# EAGLE board ESP8266BMESensor (EAGLE 8.6.3)
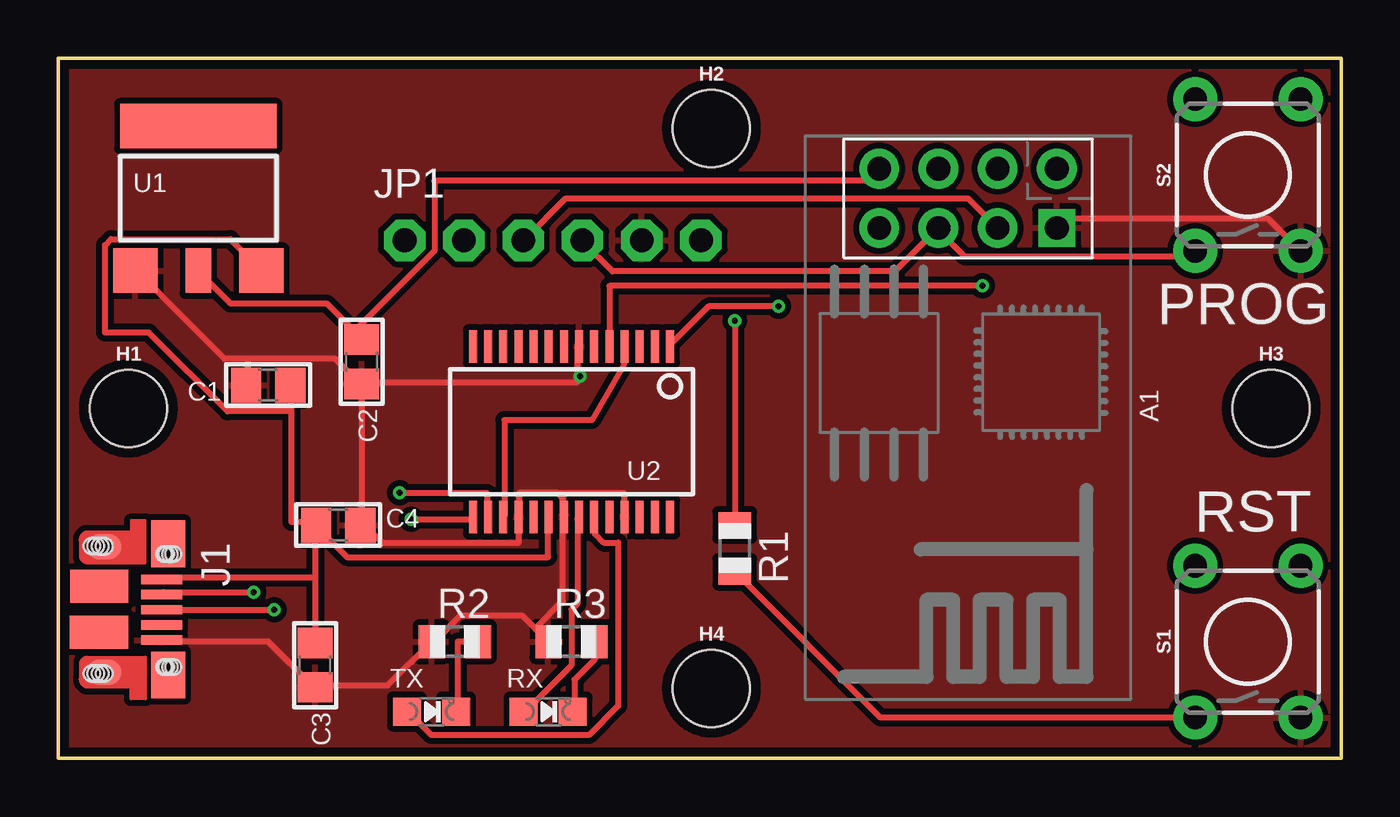
[diagram p0: board, top side]
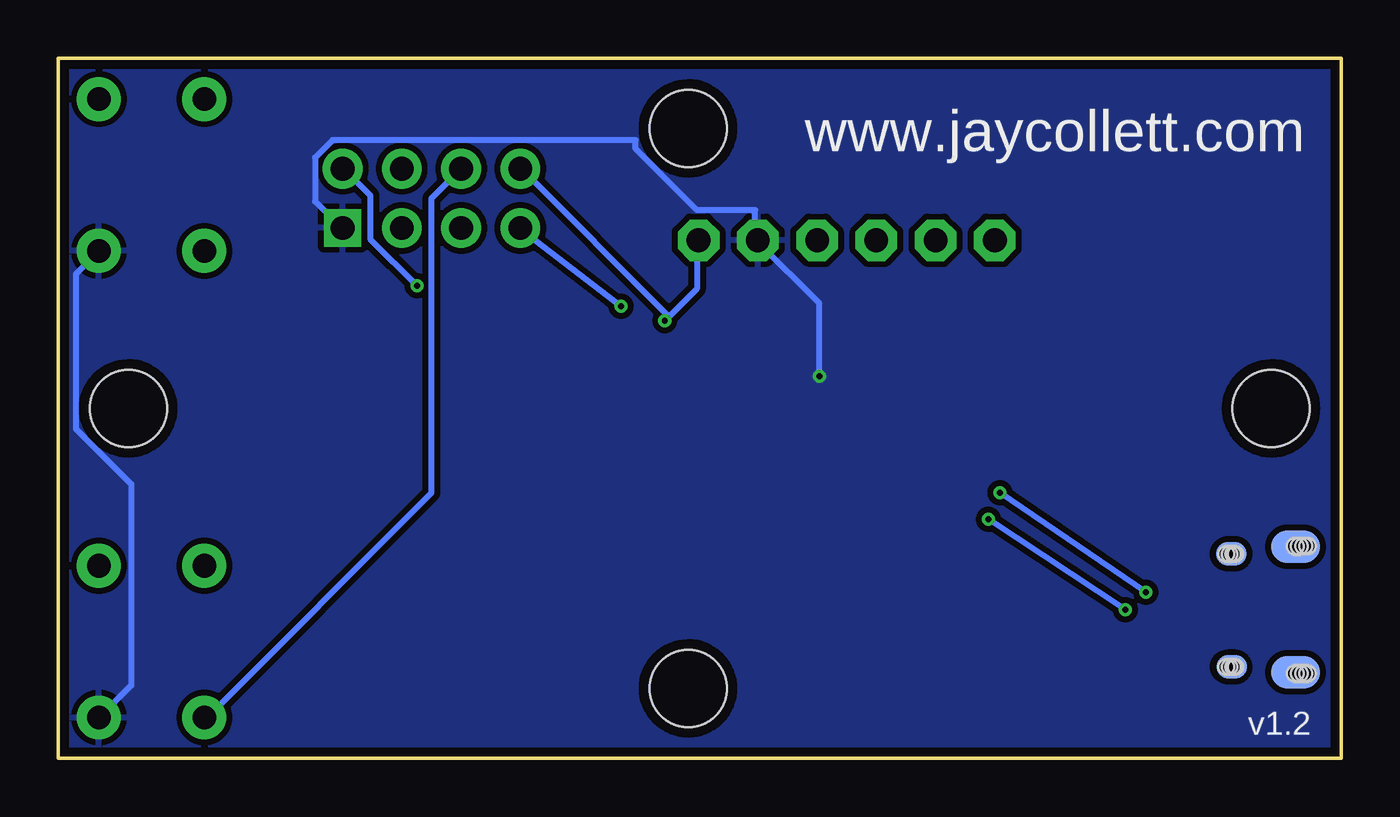
[diagram p1: board, bottom side, seen from below]

Size 55 x 30 mm. Coordinates in mm from the lower left corner, seen from the top.
Outline: 0,0 55,0 55,30 0,30 0,0
Copper layers (1*16): Top 0.035559375mm / dielectric 1.6mm / Bottom 0.035559375mm
Design rules "oshpark-2layer-auto-routing": minimum track width 10mil, minimum drill 10mil, track to track 10mil, track to pad 8mil, pad to pad 8mil, via to via 8mil, smd to smd 6mil, copper to edge 15mil, drill to drill 6mil, minimum pad ring 6mil, minimum via ring 6mil, stop-mask expansion 2.5mil, vias tented up to drill 0mil, thermal gap 10mil

## Footprints (pad centres in the part's own frame; a part is rotated, then mirrored left to right if it is on the bottom)
ESP8266_ESP-01_NO-SILKSCREEN = drill 1.016 pad 1.7: 3V3 -1.27,-3.81; EN/CH_PD -1.27,1.27; GPIO0 1.27,-1.27; GPIO2 1.27,1.27; RST -1.27,-1.27; RX 1.27,-3.81; TX -1.27,3.81 | drill 1.016 pad 1.6 square: GND 1.27,3.81
0805 = smd 1.3 x 1.5: 1 -0.95,0; 2 0.95,0
STAND-OFF = hole 3.302: 0,0
USB-MICROB-PTH = smd 0.4 x 1.75: D+ 0.031,1.331; D- -0.619,1.331; GND 1.331,1.331; ID 0.681,1.331; VBUS -1.269,1.331 | smd 1.4 x 2.1 bottom: P$1 2.701,-1.142; P$3 -2.659,-1.144 | smd 1 x 1.3: P$2 2.487,1.594; P$6 -2.368,1.604 | smd 1 x 1.3 bottom: P$4 -2.368,1.604; P$10 2.481,1.598 | smd 1.1 x 1.5: P$8 2.701,-1.142; P$12 -2.659,-1.144 | smd 2 x 1.46: SHEILD2 2.831,1.606; SHIELD -2.794,1.606 | smd 1.425 x 2.5: SHIELD3 -0.979,-1.349; SHIELD4 0.996,-1.352 | hole 0.7: -2.693,-1.134; -2.693,-1.3; -2.694,-1.499; -2.694,-1.664; 2.768,-1.134; 2.767,-1.303; 2.766,-1.496; 2.766,-1.664 | hole 0.66: -2.359,1.821; -2.349,1.691; -2.359,1.541; -2.354,1.432; 2.481,1.821; 2.491,1.691; 2.481,1.541; 2.486,1.432
1X06-CLEANBIG = drill 1.016 pad 1.778 octagon: 1 -6.35,0; 2 -3.81,0; 3 -1.27,0; 4 1.27,0; 5 3.81,0; 6 6.35,0
R0805 = smd 1.1 x 1.4: 1 -1,0; 2 1,0
CHIPLED_0805_NOOUTLINE = smd 1.2 x 1.2: A 0,-1.05; C 0,1.05
TACTILE_SWITCH_PTH_6.0MM = drill 1.016 pad 1.88: 1 -3.251,2.261; 2 3.251,2.261; 3 -3.251,-2.261; 4 3.251,-2.261
SOT223-W = smd 1.9 x 1.9: 1 -2.7,-3.1; 3 2.7,-3.1 | smd 1.1 x 1.9: 2 0,-3.1 | smd 6.7 x 1.9: 4 0,3.1
SSOP28DB = smd 0.348 x 1.397: 1 -4.225,-3.656; 2 -3.575,-3.656; 3 -2.925,-3.656; 4 -2.275,-3.656; 5 -1.625,-3.656; 6 -0.975,-3.656; 7 -0.325,-3.656; 8 0.325,-3.656; 9 0.975,-3.656; 10 1.625,-3.656; 11 2.275,-3.656; 12 2.925,-3.656; 13 3.575,-3.656; 14 4.225,-3.656; 15 4.225,3.656; 16 3.575,3.656; 17 2.925,3.656; 18 2.275,3.656; 19 1.625,3.656; 20 0.975,3.656; 21 0.325,3.656; 22 -0.325,3.656; 23 -0.975,3.656; 24 -1.625,3.656; 25 -2.275,3.656; 26 -2.925,3.656; 27 -3.575,3.656; 28 -4.225,3.656

## Placement (x,y rotation side)
A1  [ESP8266_ESP-01_NO-SILKSCREEN]  39,24 270 top
C1  1uF  [0805]  9,16 180 top
C2  1uF  [0805]  13,17 270 top
C3  0.1uF  [0805]  11,4 270 top
C4  10uF  [0805]  12,10 0 top
FRAME1  FRAME-LETTERNO_PACKAGE  [DUMMY]  35,1 0 top
H1  STAND-OFF  [STAND-OFF]  3,15 0 top
H2  STAND-OFF  [STAND-OFF]  28,27 0 top
H3  STAND-OFF  [STAND-OFF]  52,15 0 top
H4  STAND-OFF  [STAND-OFF]  28,3 0 top
J1  AMP FCI 10103594-0001LF  [USB-MICROB-PTH]  3.1,6.4 270 top
JP1  [1X06-CLEANBIG]  21.2,22.2 0 top
R1  10k  [R0805]  29,9 270 top
R2  330  [R0805]  17,5 0 top
R3  330  [R0805]  22,5 0 top
RX  [CHIPLED_0805_NOOUTLINE]  21,2 270 top
S1  MOMENTARY-SWITCH-SPST-PTH-6.0MM  [TACTILE_SWITCH_PTH_6.0MM]  51,5 90 top
S2  MOMENTARY-SWITCH-SPST-PTH-6.0MM  [TACTILE_SWITCH_PTH_6.0MM]  51,25 90 top
TX  [CHIPLED_0805_NOOUTLINE]  16,2 270 top
U1  [SOT223-W]  6,24 0 top
U2  [SSOP28DB]  22,14 180 top

## Library data of the parts
A1 = LuisLab-Boards
C1-C4 RX TX U1 U2 = microbuilder
FRAME1 = SparkFun-Aesthetics; DESIGNER: Nobody; VERSION: v01
H1-H4 = SparkFun-Hardware
J1 = SparkFun-Connectors; PROD_ID: CONN-13711
JP1 R1-R3 = adafruit
S1 S2 = SparkFun-Switches; PROD_ID: SWCH-08441; SF_SKU: COM-00097

## Nets
3.3V: A1.3V3 C2.1 JP1.6 R1.1 U1.2
+5V: C1.1 C3.1 C4.1 J1.VBUS U1.3 U2.20
CSB: JP1.2
EN/CHPD: A1.EN/CH_PD
GND: A1.GND C1.2 C2.2 C3.2 C4.2 J1.GND JP1.5 R2.1 R3.1 S1.3 S2.3 U1.1 U2.7 U2.18 U2.21 U2.25
N$2: R2.2 TX.C
N$3: R3.2 RX.C
N$4: U2.4 U2.17
RST: A1.RST R1.2 S1.1
RX: A1.RX U2.1
RXLED: RX.A U2.22
SCL: A1.GPIO2 JP1.3
SDA: A1.GPIO0 JP1.4 S2.1
SDO: JP1.1
TX: A1.TX U2.5
TXLED: TX.A U2.23
USB+: J1.D+ U2.15
USB-: J1.D- U2.16

## Tracks (layer width: path | path; a pad name or v marks a point on that pad's centre or on a via)
3.3V  (via drill 0.25)
  Top 0.254: U1.2 6,20.88 7.38,19.5 11.5,19.5 13,18 C2.1 12.75,18.38 16.12,21.75 16.12,24.75 34.62,24.75 35.12,25.25 A1.3V3 | v29,18.75 R1.1
  Bottom 0.254: JP1.6 27.62,22.12 27.62,20.12 v29,18.75 28.88,19 35.12,25.25 A1.3V3
+5V
  Top 0.254: U2.20 21,10.25 21,8.62 12.38,8.62 11,10 C4.1 | 11,7.75 11,9.88 C4.1 | 11,7.75 C3.1 | 10,14.88 10,10.12 11,10.12 C4.1 | 10,14.88 10,16 C1.1 | 11,7.75 4.5,7.75 J1.VBUS | 10,14.88 7.25,14.88 3.88,18.25 2,18.25 2,22 2.25,22.25 7.38,22.25 8.62,21 U1.3
GND  (via drill 0.25)
  Top 0.254: A1.GND 42.88,22.75 43.25,23.12 51.88,23.12 S2.3 | 21.38,11.38 19.75,11.38 19.75,10.38 U2.18 19.75,10.25 19.75,9.25 13.88,9.25 13.12,10 C4.2 13,10 C2.2 | 21.38,11.38 21.62,11.12 21.62,10.38 U2.21 21.62,10.25 21.62,6.75 20.5,5.62 R3.1 19.88,6.12 17.25,6.12 16.12,5 R2.1 14.12,3.12 11,3.12 C3.2 10.88,3.12 9,5 4.5,5 J1.GND | 21.38,11.38 24.25,11.38 24.25,10.38 U2.25 | 22.25,16.38 22.25,16.12 13,16.12 C2.2 | 22.25,16.38 22.25,17.62 U2.7 | 8.12,17.12 8.12,16 C1.2 | 8.12,17.12 11.88,17.12 12.88,16.12 C2.2 | 8.12,17.12 7.12,17.12 3.38,20.88 U1.1 | v22.38,16.38 22.25,16.38
  Bottom 0.254: S1.3 51.88,3.12 51.88,11.75 54.25,14.12 54.25,20.75 53.38,21.62 S2.3 | v22.38,16.38 22.38,19.5 25,22.12 JP1.5 25.12,22.25 25.12,23.5 27.62,23.5 30.25,26.12 30.25,26.5 43.25,26.5 44,25.75 44,23.88 42.88,22.75 A1.GND
  pour Top (isolate 0.16): 0,30 55,30 55,0 0,0
  pour Bottom (isolate 0.16): 0,30 55,30 55,0 0,0
N$2
  Top 0.254: R2.2 17.12,5 17.12,2 TX.C
N$3
  Top 0.254: R3.2 23,4.25 22.12,3.38 22.12,2 RX.C
N$4
  Top 0.254: U2.17 19.12,10.38 19.12,14.5 22.88,14.5 24.25,16.88 24.25,17.62 U2.4
RST
  Top 0.254: R1.2 35.25,1.75 48.62,1.75 S1.1
  Bottom 0.254: A1.RST 39,24 39,11.38 48.62,1.75 S1.1
RX  (via drill 0.25)
  Top 0.254: v30.88,19.38 27.88,19.38 26.25,17.75 U2.1
  Bottom 0.254: v30.88,19.38 35.12,22.62 A1.RX
RXLED
  Top 0.254: RX.A 20,2 22,4 22,6.38 22.25,6.62 22.25,10.25 U2.22
SCL
  Top 0.254: A1.GPIO2 39,24 21.75,24 20,22.25 JP1.3
SDA
  Top 0.254: S2.1 48.62,21.62 48.5,21.5 38.88,21.5 37.75,22.62 A1.GPIO0 35.88,20.88 23.75,20.88 22.5,22.12 JP1.4
TX  (via drill 0.25)
  Top 0.254: U2.5 23.62,20.25 v39.62,20.25
  Bottom 0.254: v39.62,20.25 41.62,22.25 41.62,24.12 42.75,25.25 A1.TX
TXLED
  Top 0.254: TX.A 15,2 16,1 22.75,1 24,2.25 24,9.25 23.38,9.25 23,9.62 23,10.25 U2.23
USB+  (via drill 0.25)
  Top 0.254: v15.12,10.25 17.75,10.25 U2.15 | v9.25,6.38 4.5,6.38 J1.D+
  Bottom 0.254: v9.25,6.38 v15.12,10.25
USB-  (via drill 0.25)
  Top 0.254: v14.62,11.38 18.38,11.38 18.38,10.38 U2.16 | v8.38,7.12 4.5,7.12 J1.D-
  Bottom 0.254: v8.38,7.12 v14.62,11.38

## Text on the board
tPlace: PROG | RST
bPlace: www.jaycollett.com | v1.2